# Altium PCB TSSOP_ADAPT.PCBDOC
Units mm, origin at the board's own origin, x right, y up, seen from the top; angles counter-clockwise.
Board outline 152.4 x 101.6 mm, 2 copper layers (Top Layer, Bottom Layer); 2 components, 0 nets, 32 pads, 0 vias.
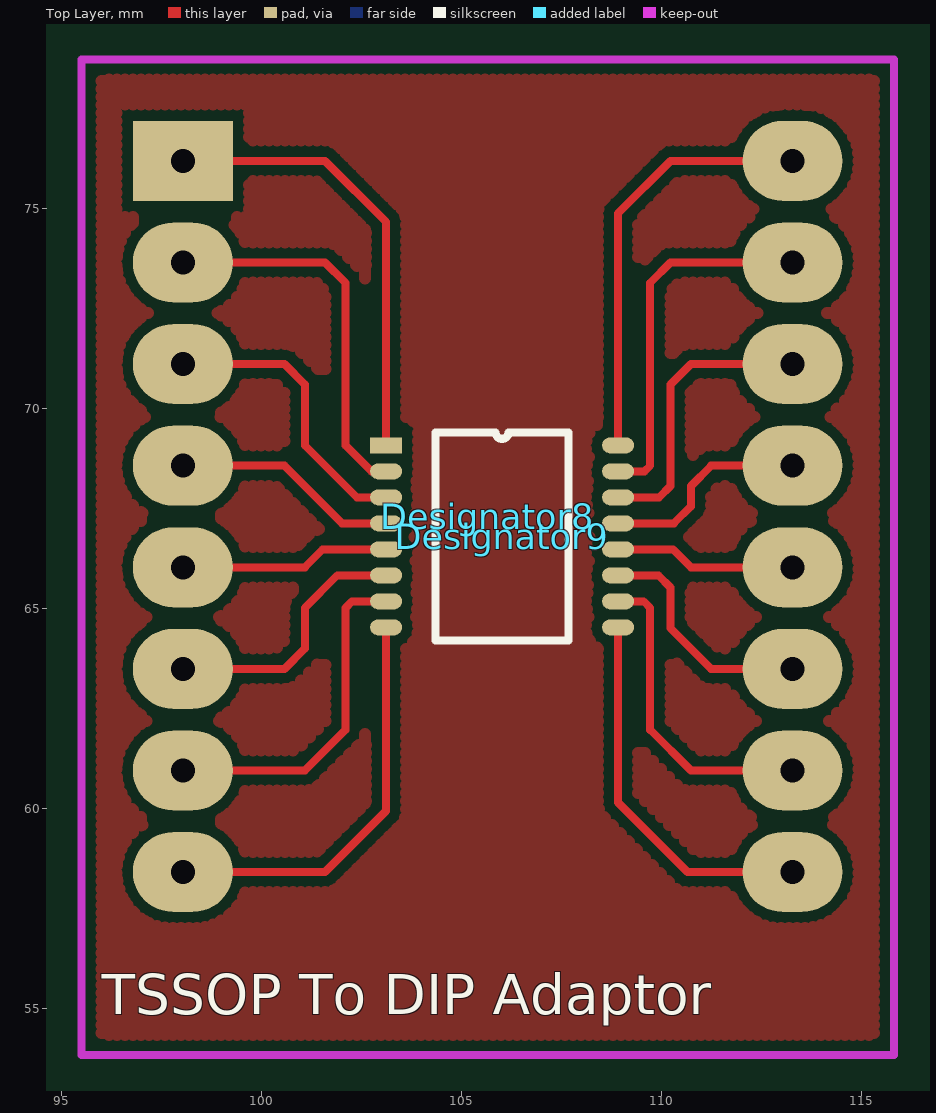
[diagram p0: Top Layer view]
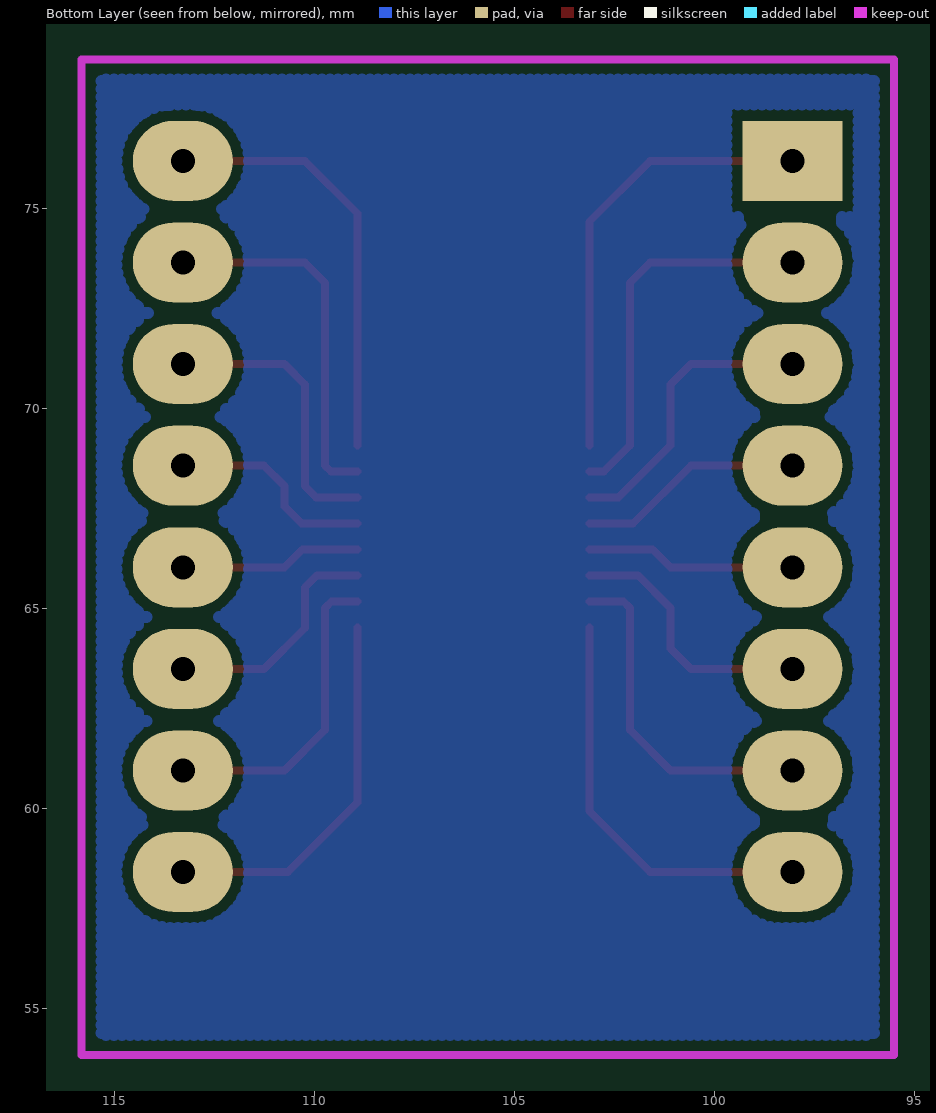
[diagram p1: Bottom Layer view, seen from below]

## Layer stack, top to bottom
Top Layer: signal copper 0.0356
Dielectric: dielectric 0.32, FR-4, Dk 4.8
Bottom Layer: signal copper 0.0356

## Board outline
25.4,25.4 177.8,25.4 177.8,127 25.4,127

## Design rules (kind name [scope] priority, off if disabled: settings)
Clearance [All] p1: gap=0.254
ComponentClearance [All] p1: gap=0.254 collisioncheckmode=0
PolygonConnect [All] p1: connectstyle=Relief reliefconductorwidth=0.254 reliefentries=4 polygonreliefangle="90 Angle"
RoutingLayers [All] p1: top layer=Horizontal bottom layer=Vertical
RoutingVias [All] p1: holewidth=0.711 width=1.27 viastyle="Through Hole" minholewidth=0.711 minwidth=1.27 maxholewidth=0.711 maxwidth=1.27
ShortCircuit [All] p1: allowed=TRUE
SolderMaskExpansion [All] p1: expansion=0.102
TestPointUsage [All] p1: valid=0 allowmultiple=FALSE
Testpoint [All] p1: side=15 testpointundercomponent=TRUE minsize=1.016 maxsize=2.54 preferedsize=1.524 minholesize=0 maxholesize=1.016 preferedholesize=0.813 testpointgrid=0.025 style=1023 order=-539222988
Width [All] p1: maxlimit=0.254 minlimit=0.2 preferedwidth=0.254 toplayer_maxwidth=0.2 toplayer_prefwidth=0.2 bottomlayer_maxwidth=0.2 bottomlayer_prefwidth=0.2 minimp=50.000000 maximp=50.000000 favimp=50.000000
15 further rules are at their usual default settings.

## Components (designator, comment, footprint, x,y, rotation, side; value= is the part's Value field where it differs from the comment)
Designator8 "Comment" DIP16-Adaptor 98.044,76.2 r0 top
Designator9 "Comment" TSSOP16_RU-16 103.124,69.088 r0 top

## Footprints (in the part's own frame and the unit in brackets; to place one, negate y for a bottom-side part, rotate by r counter-clockwise, add the part's x,y. Pads: shape width x height; smd on the part's side, far side on the other; paste and mask are expansions set on the pad)
DIP16-Adaptor [mm]
  rect 2.5x2 hole 0.6: 1(0,0)
  oval 2.5x2 hole 0.6: 2(0,-2.54) 3(0,-5.08) 4(0,-7.62) 5(0,-10.16) 6(0,-12.7) 7(0,-15.24) 8(0,-17.78) 9(15.24,-17.78) 10(15.24,-15.24) 11(15.24,-12.7) 12(15.24,-10.16) 13(15.24,-7.62) 14(15.24,-5.08) 15(15.24,-2.54) 16(15.24,0)
TSSOP16_RU-16 [mm]
  rect 0.8x0.4 smd: 1(0,0)
  oval 0.8x0.4 smd: 2(0,-0.65) 3(0,-1.3) 4(0,-1.95) 5(0,-2.6) 6(0,-3.25) 7(0,-3.9) 8(0,-4.55) 9(5.8,-4.55) 10(5.8,-3.9) 11(5.8,-3.25) 12(5.8,-2.6) 13(5.8,-1.95) 14(5.8,-1.3) 15(5.8,-0.65) 16(5.8,0)
  silkscreen extent 1.23,-4.88 4.57,0.33

## Nets (pads, with @x,y where several pads share a name; then routed paths per layer and width w, separated by ;. In a path a pad name is that pad's centre, name@x,y a point inside that pad or via, vN(x,y) a via of type N, cw(c..) or ccw(c..) an arc to the next point about the centre after c; other vN are vias at no path point)
pads on no net: Designator8.1 Designator8.2 Designator8.3 Designator8.4 Designator8.5 Designator8.6 Designator8.7 Designator8.8 Designator8.9 Designator8.10 Designator8.11 Designator8.12 Designator8.13 Designator8.14 Designator8.15 Designator8.16 Designator9.1 Designator9.2 Designator9.3 Designator9.4 Designator9.5 Designator9.6 Designator9.7 Designator9.8 Designator9.9 Designator9.10 Designator9.11 Designator9.12 Designator9.13 Designator9.14 Designator9.15 Designator9.16
copper on no net: | length 125
  Top Layer w0.2: 98.044,58.42 101.6,58.42 103.124,59.944 103.124,64.538 ; 98.044,60.96 101.092,60.96 102.108,61.976 102.108,65.024 102.272,65.188 103.124,65.188 ; 98.044,63.5 100.584,63.5 101.092,64.008 101.092,65.024 101.906,65.838 103.124,65.838 ; 98.044,66.04 101.092,66.04 101.54,66.488 103.124,66.488 ; 98.044,68.58 100.584,68.58 102.026,67.138 103.124,67.138 ; 98.044,71.12 100.584,71.12 101.092,70.612 101.092,69.088 102.392,67.788 103.124,67.788 ; 98.044,73.66 101.6,73.66 102.108,73.152 102.108,69.088 102.758,68.438 103.124,68.438 ; 98.044,76.2 101.6,76.2 103.124,74.676 103.124,69.088 ; 108.924,64.538 108.924,60.156 110.66,58.42 113.284,58.42 ; 108.924,65.188 109.564,65.188 109.728,65.024 109.728,61.976 110.744,60.96 113.284,60.96 ; 108.924,65.838 109.93,65.838 110.236,65.532 110.236,64.516 111.252,63.5 113.284,63.5 ; 108.924,66.488 110.296,66.488 110.744,66.04 113.284,66.04 ; 108.924,67.138 110.318,67.138 110.744,67.564 110.744,68.072 111.252,68.58 113.284,68.58 ; 108.924,67.788 109.952,67.788 110.236,68.072 110.236,70.612 110.744,71.12 113.284,71.12 ; 108.924,68.438 109.586,68.438 109.728,68.58 109.728,73.152 110.236,73.66 113.284,73.66 ; 108.924,69.088 108.924,74.38 108.924,74.888 110.236,76.2 113.284,76.2

## Polygon pours and split planes (outlines as drawn)
no net on Top Layer (hatched 90Degree grid 0.2 track 0.3): 95.504,78.74 115.824,78.74 115.824,53.848 95.504,53.848
no net on Bottom Layer (hatched 90Degree grid 0.2 track 0.3): 95.504,78.74 115.824,78.74 115.824,53.848 95.504,53.848

## Keep-outs
Keep-Out Layer:
  lines w0.2: 95.504,53.848 115.824,53.848 115.824,78.74 95.504,78.74 95.504,53.848

## Silkscreen, mask and mechanical layers (free items; w line width, h text height)
Top Overlay:
  text "TSSOP To DIP Adaptor" at 96.012,54.864 h1